# Altium PCB ESP32_SERVO.PcbDoc
Units mil, origin at the board's own origin, x right, y up, seen from the top; angles counter-clockwise.
Board outline 3360 x 3025 mil, 2 copper layers (Top Layer, Bottom Layer); 20 components, 26 nets, 93 pads, 8 vias.
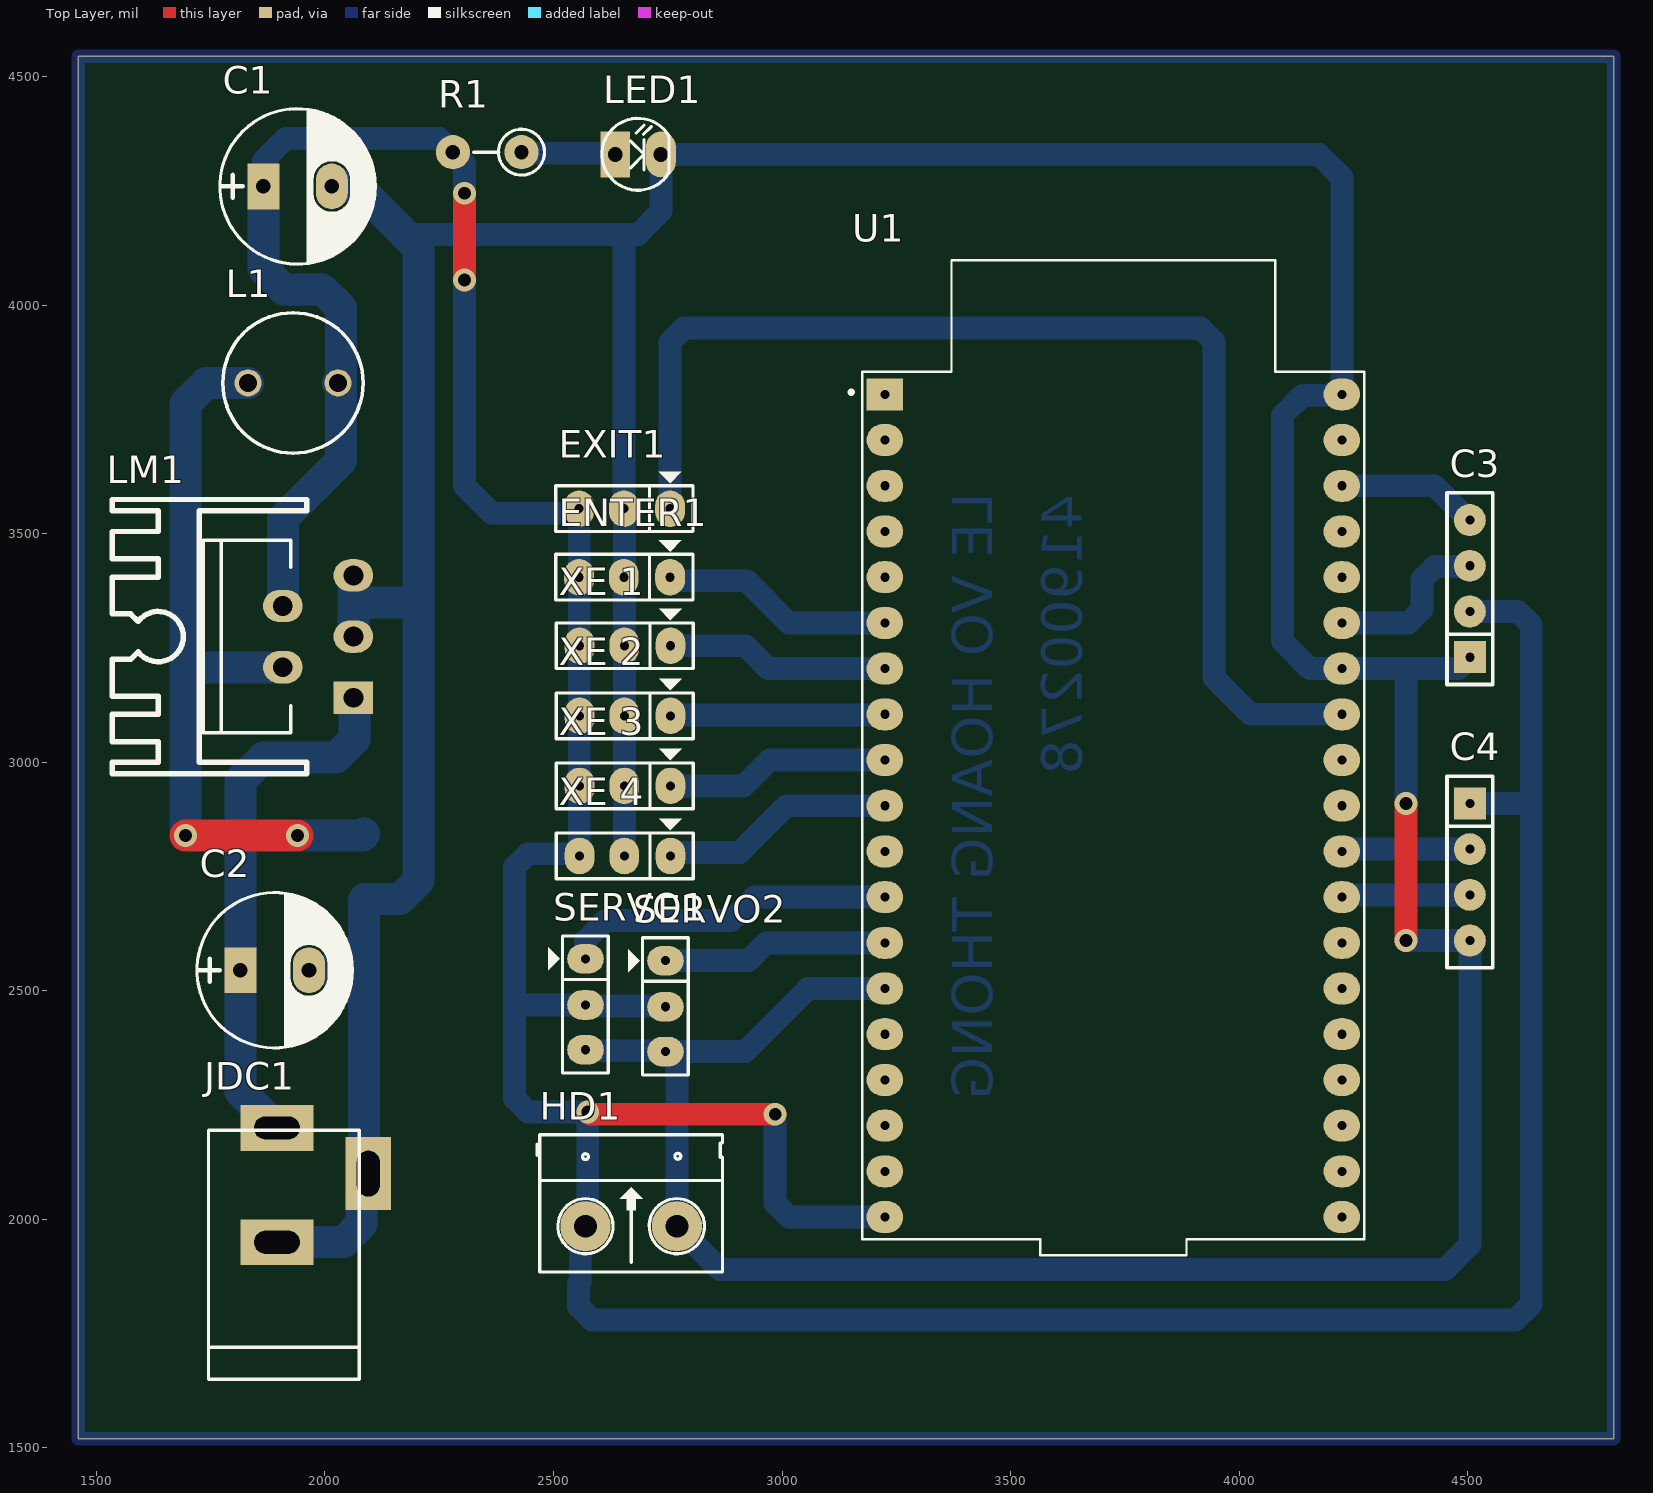
[diagram p0: Top Layer view]
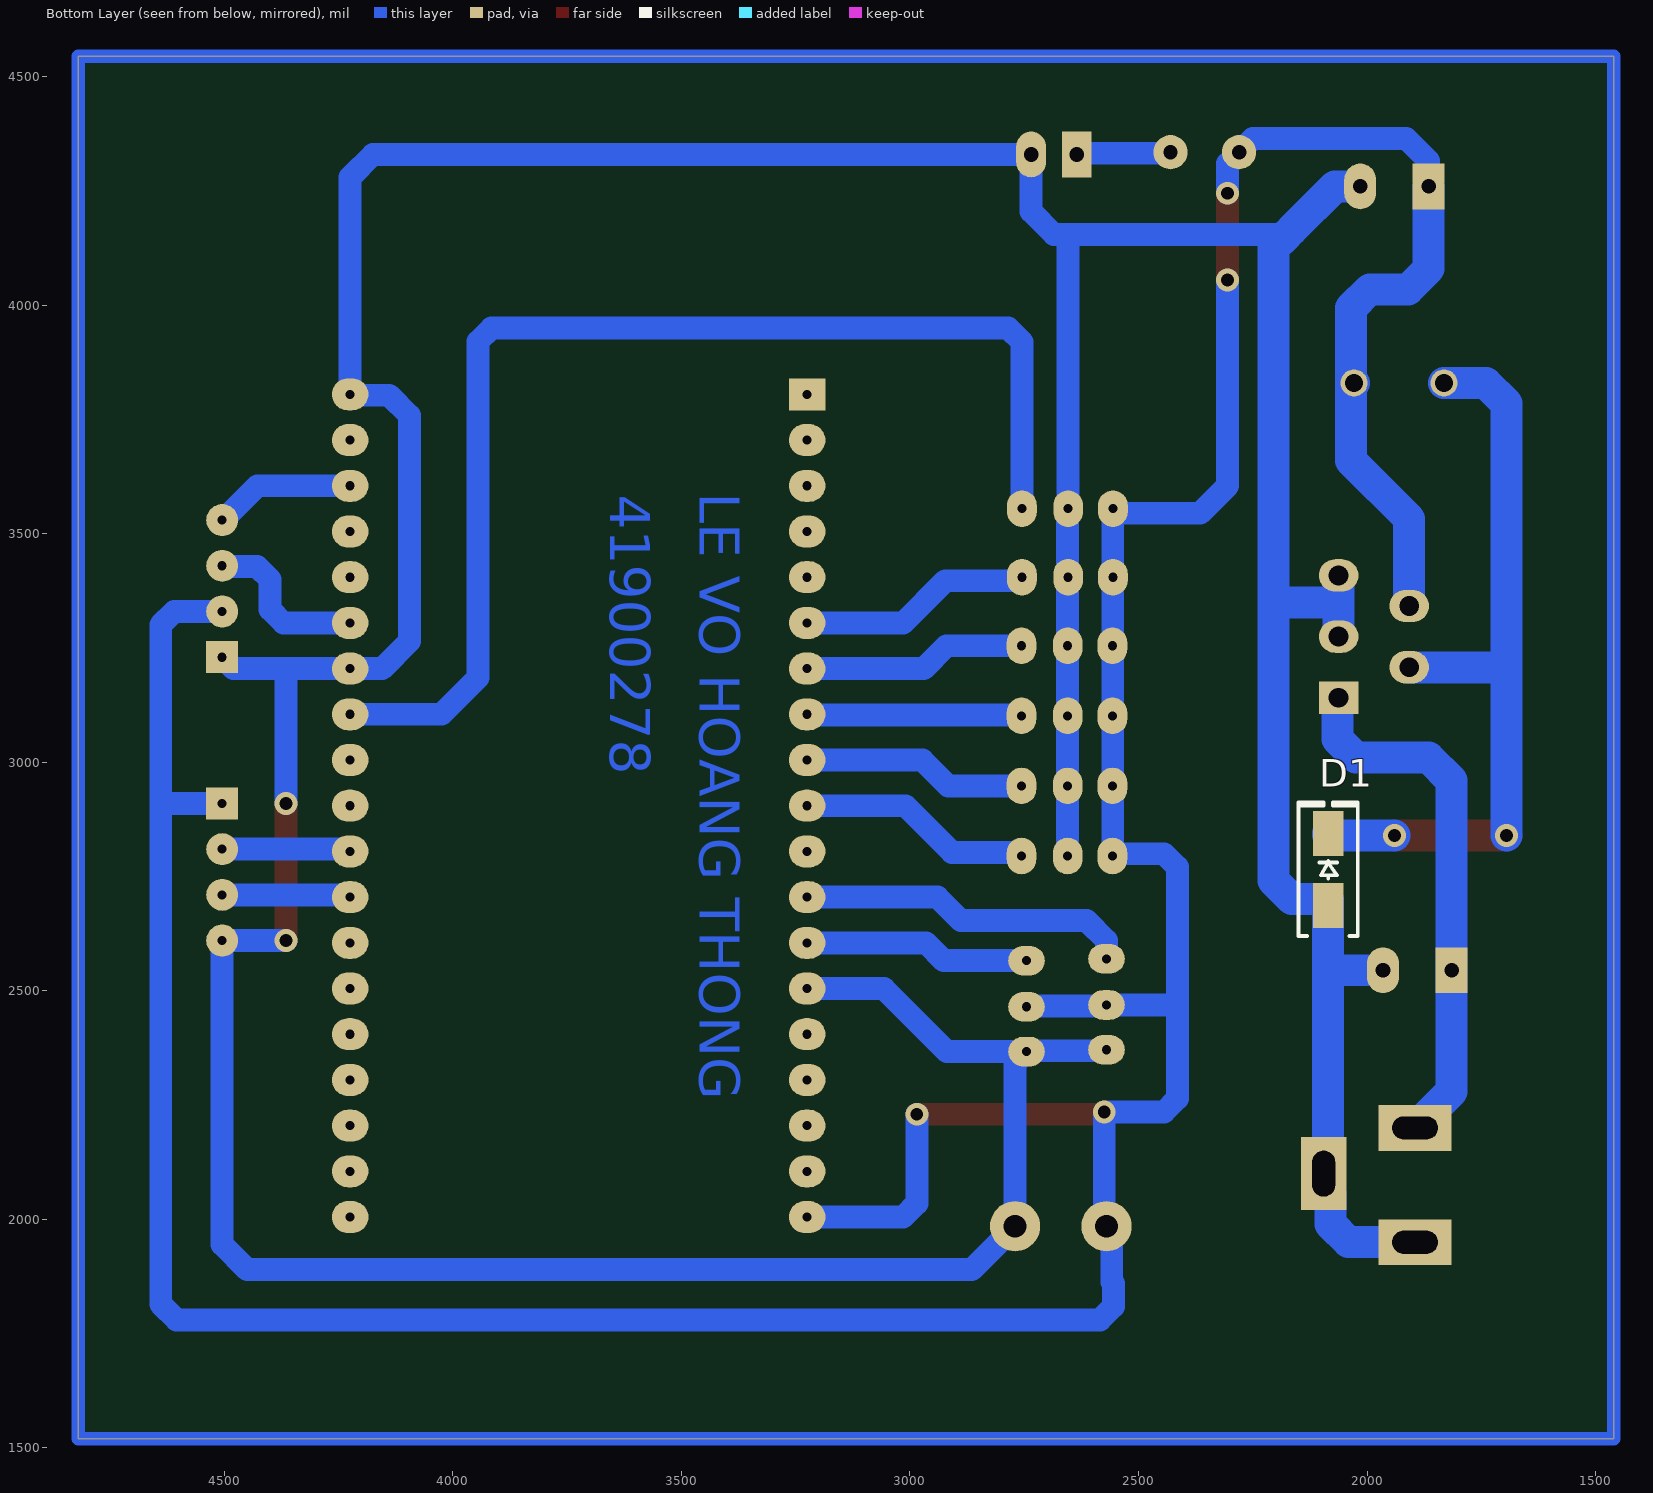
[diagram p1: Bottom Layer view, seen from below]
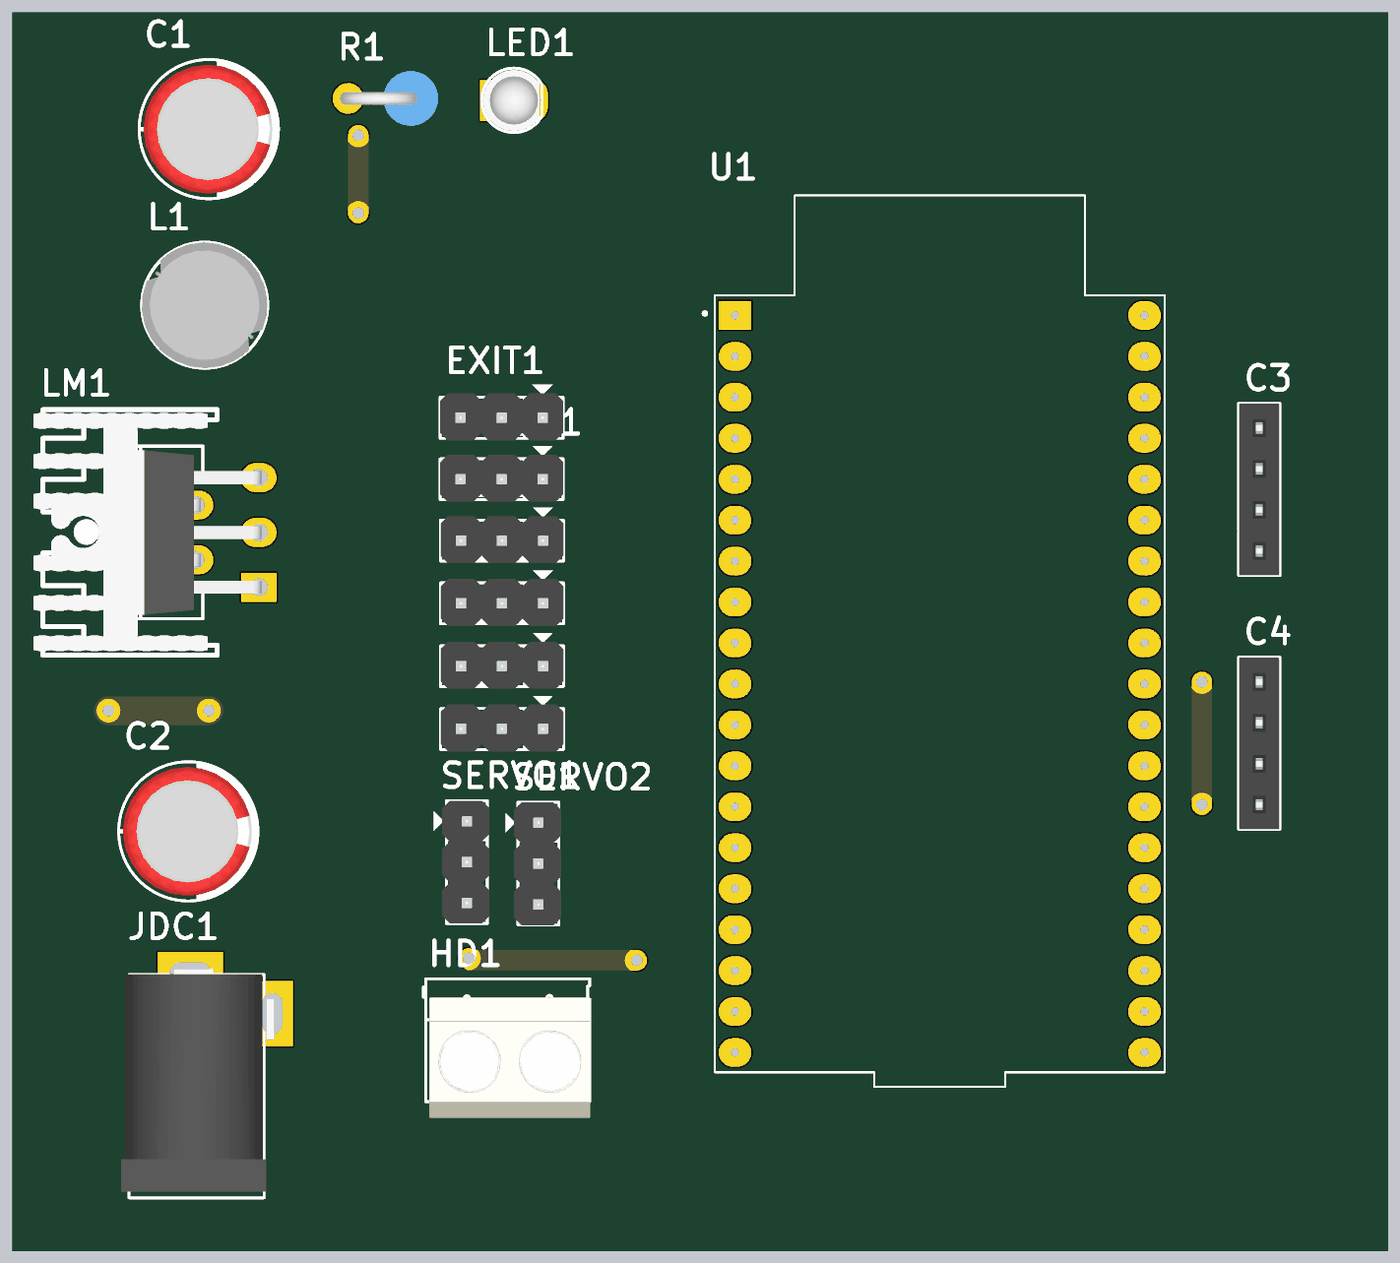
[diagram p2: 3D render of the assembled board from above, using the file's embedded part models]

## Layer stack, top to bottom
Top Solder: solder mask 0.4, Solder Resist, Dk 3.5
Top Layer: signal copper 1.4
Dielectric 1: dielectric 12.6, FR-4, Dk 4.8
Bottom Layer: signal copper 1.4
Bottom Solder: solder mask 0.4, Solder Resist, Dk 3.5

## Board outline
1460,1520 1460,4545 4820,4545 4820,1520

## Design rules (kind name [scope] priority, off if disabled: settings)
Clearance [All] p1: gap=30 ignorepadtopadclearanceinfootprint=FALSE
PolygonConnect [All] p1: connectstyle=Relief reliefconductorwidth=10 reliefentries=4 polygonreliefangle="90 Angle" airgapwidth=10
RoutingVias [All] p1: holewidth=28 width=50 viastyle="Through Hole" minholewidth=28 minwidth=50 maxholewidth=28 maxwidth=50
SolderMaskExpansion [All] p1: expansion=4
Width [All] p1: maxlimit=70 minlimit=35 preferedwidth=50
30 further rules are at their usual default settings.

## Components (designator, comment, footprint, x,y, rotation, side; value= is the part's Value field where it differs from the comment)
C1 "100uF/16V" CP1.5/3.4 1865,4260 r0 top value=1000uF/16V
C2 "100uF/16V" CP1.5/3.4 1815,2545 r0 top value=1000uF/16V
C3 "JP4" JP4-C1T 4505,3230 r90 top
C4 "JP4" JP4-C1T 4505,2910 r270 top
D1 "SS34" "DIODE SMA" 2085,2765 r90 bottom
ENTER1 "" JP3 2655,3405 r180 top value=J3
EXIT1 "" JP3 2655,3555 r180 top value=J3
HD1 "Header 2" HED2 2570,1985 r0 top
JDC1 "Jac DC" DC-IN 1995,2075 r90 top
L1 "3.3 UH" L-DIP-M-7.8 1930,3830 r0 top value="150 mH"
LED1 "LED" LED-3 2635,4330 r0 top value="LED 3 ly Single Colour"
LM1 "LM2576" QTO-220-5-1H1 1985,3275 r90 top
R1 "330" R1/4WD 2430,4335 r180 top value="R1/4W - 1K"
SERVO1 "" JP3 2570,2470 r270 top value=J3
SERVO2 "" JP3 2745,2466 r270 top value=J3
U1 "ESP32-DEVKITC-32U" MODULE_ESP32-DEVKITC-32U 3725,2905.39 r0 top
"XE 1" "" JP3 2656,3255 r180 top value=J3
"XE 2" "" JP3 2656,3101.67 r180 top value=J3
"XE 3" "" JP3 2656,2948.33 r180 top value=J3
"XE 4" "" JP3 2656,2795 r180 top value=J3

## Footprints (in the part's own frame and the unit in brackets; to place one, negate y for a bottom-side part, rotate by r counter-clockwise, add the part's x,y. Pads: shape width x height; smd on the part's side, far side on the other; paste and mask are expansions set on the pad)
CP1.5/3.4 [mil] "Tu hoa 220->470uF,16V, 470uF/16V,25V"
  rect 70x100 hole 32: 1(0,0)
  oval 70x100 hole 32: 2(150,0)
  silkscreen extent -95,-170 245,170, body extent -85,-157 230,157, height 446
DC-IN [mil] "Jac DC input"
  rect 100x160 hole 50 slot 100 at 90 deg: 1(125,100) 2(-125,100)
  rect 160x100 hole 50 slot 100 at 0 deg: 3(25,-100)
  silkscreen extent -425,-80 120,250, body extent -410,-105 134,269, height 434
"DIODE SMA" [mm] "SMA"
  rect 2.5x1.7 smd: 1(-2,0) 2(2,0)
  silkscreen extent -3.68,-1.65 3.75,1.65, body extent -2.6,-1.37 2.6,1.37, height 2.4
HED2 [mil] "Header 2, 2 pin, hight 300mil, Pin to Pin 200, Colour Green"
  round 110 hole 50: 1(0,0) 2(200,0)
  silkscreen extent -106,-100 300,200, body extent -92,-140 302,155, height 394
JP3 [mil] "Jumper 3"
  oval 65x80 hole 20: 1(-100,0) 2(1,0) 3(99,0)
  silkscreen extent -150,-81 150,50, body extent -150,-60 150,55, height 355
JP4-C1T [mil] "4 row, straight, gold plating"
  rect 70x70 hole 20: 1(0,0)
  round 70 hole 20: 2(100,0) 3(200,0) 4(300,0)
  silkscreen extent -60,-50 360,50, body extent -60,-49 360,49, height 335
L-DIP-M-7.8 [mm] "THT Inductor, 2-Leads, Body 7,8  mm"
  round 1.5 hole 1: 1(-2.5,0) 2(2.5,0)
  silkscreen extent -3.9,-3.9 3.9,3.9, body extent -3.9,-3.9 3.89,3.9, height 9.5
LED-3 [mil] "LED 2 PIN, 3ly Only colour"
  rect 65x100 hole 32: 1(0,0)
  oval 65x100 hole 32: 2(100,0)
  silkscreen extent -29,-78 118,79, body extent -25,-75 113,75, height 217
MODULE_ESP32-DEVKITC-32U [mil]
  rect 80x70 hole 20: 1(-500,899.61)
  oval 80x70 hole 20: 2(-500,799.61) 3(-500,699.61) 4(-500,599.61) 5(-500,499.61) 6(-500,399.61) 7(-500,299.61) 8(-500,199.61) 9(-500,99.61) 10(-500,-0.39) 11(-500,-100.39) 12(-500,-200.39) 13(-500,-300.39) 14(-500,-400.39) 15(-500,-500.39) 16(-500,-600.39) 17(-500,-700.39) 18(-500,-800.39) 19(-500,-900.39) 20(500,-900.39) 21(500,-800.39) 22(500,-700.39) 23(500,-600.39) 24(500,-500.39) 25(500,-400.39) 26(500,-300.39) 27(500,-200.39) 28(500,-100.39) 29(500,-0.39) 30(500,99.61) 31(500,199.61) 32(500,299.61) 33(500,399.61) 34(500,499.61) 35(500,599.61) 36(500,699.61) 37(500,799.61) 38(500,899.61)
  silkscreen extent -578,-984 549,1193
QTO-220-5-1H1 [mm] "TO, Thru-Hole, Vertical, Heatsink Mounted; 5 Bent Staggered Leads; Pitch 1.7mm"
  rect 1.8x2.2 hole 1.1: 1(-3.4,-1.96)
  oval 1.8x2.2 hole 1.1: 2(-1.7,1.96) 3(0,-1.96) 4(1.7,1.96) 5(3.4,-1.96)
  round 0 all layers, no hole: 6(0,8.89)
  silkscreen extent -7.62,0.63 7.62,11.43, body extent -7.37,-2.1 7.42,12.01, height 25
R1/4WD [mm] "R 1/4W, 2 Pin, 150mil"
  round 1.905 hole 0.8: 1(0,0) 2(3.81,0)
  silkscreen extent -1.28,-1.28 2.67,1.28, body extent -1.78,-1.7 4.32,1.7, height 13.42

## Part data
C1 C2: library part CP4, "Cap 1000uF/16V - 220uF/50V", Description 1="2200uF-3300uF/6,3V - 1000uF-2200uF/10V", Description 2="1000uF/16V - 470uF => 1000uF/25V - 100uF/100V", Description 3=330uF>470uF/35V_220uF>470uF/50V_10uF>22uF/250V, Description 4="220uF => 330uF/63V - 10uF =>33uF/160 - 200V", Description 5="4,7uF>10uF/250V_3,3uF>10uF/400V - 2,2uF>4,7uF/450V"
C3 C4: "WR-PHD 2.54 mm Angled Socket Header", Manufacturer="Würth Elektronik eiSos GmbH", partNo=613004143121, ComponentLink1 Description=Manufacturer, ComponentLink1URL=http://www.we-online.com, ComponentLink2 Description=Datasheet, ComponentLink2URL=http://katalog.we-online.de/em/datasheet/6130xx143121.pdf, Created by="Karrer Zheng", Created Date="29 March 2013", NoPins=04
D1: library part "Diode SS34 ( 1N5822 )", "D醤", Chung_Loai=D醤, Don_Vi=Con, Ma_Hang=MH002104, Ten_Linh_Kien="Diode SS34 3A 40V SMA ( 1N5822 SS34A)"
ENTER1 EXIT1 SERVO1 SERVO2 "XE 1" "XE 2" "XE 3" "XE 4": library part JP3, "Jumper 3"
HD1: library part Hed2, "Header 2 (Green)"
JDC1: library part DCIN, "Jac DC input"
L1: library part L-DIP-1, "Inductor"
LED1: "LED Single colour Green and Red"
R1: library part R1/4W, "Resistor 1/4W"
U1: "ESP32-DEVKITC", Package=None, Availability=Unavailable, MP=ESP32-DEVKITC-32U, Price=None

## Via types
v1: diameter 50, hole 28, Top Layer to Bottom Layer, 8 vias

## Nets (pads, with @x,y where several pads share a name; then routed paths per layer and width w, separated by ;. In a path a pad name is that pad's centre, name@x,y a point inside that pad or via, vN(x,y) a via of type N, cw(c..) or ccw(c..) an arc to the next point about the centre after c; other vN are vias at no path point)
3V3: U1.1
+5: "XE 1.3" "XE 2.3" "XE 3.3" "XE 4.3" C1.1 C3.2 C4.1 ENTER1.3 EXIT1.3 HD1.1 L1.2 LM1.4 R1.2 SERVO1.2 SERVO2.2 U1.19 | length 9710.4
  Top Layer w50: v1(2305,4055) v1(2305,4245) ; v1(2575,2235) 2580,2230 v1(2985,2230)
  Bottom Layer w50: C1.1 1865,4315.71 1914.29,4365 2250,4365 R1.2 2305,4310 v1(2305,4245) ; v1(2305,4055) 2305,3605 2365,3545 2546,3545 2548.13,3547.13 2549.07,3547.13 2556,3554.06 EXIT1.3 2556.5,3554.5 2556.5,3405 2556.5,3255 2556.5,3101.67 2556.5,2948.33 2556.5,2800 2444.29,2800 2415,2770.71 2415,2469 ; SERVO2.2 2743,2467 2572,2467 SERVO1.2 2415,2469 ; v1(2985,2230) 2985,2035 3015,2005 U1.19 ; C4.1 4639.21,2910 ; C3.2 4609.92,3330 4639.21,3300.71 4639.21,2910 ; 2415,2469 2415,2264.29 2444.29,2235 v1(2575,2235) 2575,1990 HD1.1 2558.52,1973.52 2558.52,1862.81 2555,1859.29 2555,1809.29 2584.29,1780 4605,1780 4639.21,1814.21 4639.21,2910
  Bottom Layer w70: C1.1 1865,4080 1910,4035 1993.99,4035 2035,3993.99 2035,3836.57 L1.2 2035,3823.43 2035,3660 1907.83,3532.83 LM1.4
+12: C2.1 JDC1.1 LM1.1 | length 1181.4
  Bottom Layer w70: JDC1.1 1815,2280 C2.1 1815,2960 1865,3010 2023.99,3010 2065,3051.01 2065,3140.71 2064.57,3141.14 LM1.1 LM1.1@2054.29,3141.14
BUZ: U1.26
GND: "XE 1.2" "XE 2.2" "XE 3.2" "XE 4.2" C1.2 C2.2 C3.1 C4.4 D1.1 ENTER1.2 EXIT1.2 HD1.2 JDC1.2 JDC1.3 LED1.2 LM1.3 LM1.5 SERVO1.3 SERVO2.3 U1.14 U1.32 U1.38 | length 12525.8
  Top Layer w50: v1(4365,2610) v1(4365,2910)
  Bottom Layer w50: 2175,4155 2654,4155 ; SERVO1.3 2572,2369 2743,2369 SERVO2.3 SERVO2.3@2745.94,2367 ; 2655,2795 2655,2948.33 2655,3101.67 2655,3255 2655,3554 EXIT1.2 2654,4155 ; U1.14 3057.14,2505 2919.14,2367 SERVO2.3@2745.94,2367 ; v1(4365,2610) C4.4 4505,1945 4450,1890 2865,1890 HD1.2 2770,2342.94 SERVO2.3@2745.94,2367 ; v1(4365,2910) 4365,3200 4370,3205 ; C3.1 4480,3205 4370,3205 ; 2654,4155 2685,4155 2735,4205 LED1.2 4175,4330 4225,4280 U1.38 4223.04,3803.04 4139.29,3803.04 4095,3758.75 4095,3265 4155,3205 U1.32 4370,3205
  Bottom Layer w70: JDC1.2 2040,1950 2080,1990 2080,2055 2095,2070 JDC1.3 2085,2110 2085,2530 ; C2.2 2070,2545 2085,2530 ; C1.2 2070,4260 2165,4165 ; LM1.3 2062.17,3350 ; LM1.5 2062.17,3350 ; 2175,4155 2205,4125 2205,3340 ; 2062.17,3350 2195,3350 2205,3340 ; 2085,2530 D1.1 2085,2698.94 2086.54,2700.47 2163.99,2700.47 2205,2741.48 2205,3340
IO0: U1.25
IO5: U1.29
IO12: SERVO2.1 U1.13 | length 496.2
  Bottom Layer w50: SERVO2.1 2926,2566 2965,2605 U1.13
IO13: U1.15
IO14: SERVO1.1 U1.12 | length 734.4
  Bottom Layer w50: SERVO1.1 2570,2610 2613.5,2653.5 2888.5,2653.5 2940,2705 U1.12
IO16: C4.3 U1.27 | length 282.1
  Bottom Layer w50: U1.27 4227.77,2705 4232.77,2710 C4.3
IO17: C4.2 U1.28 | length 282.1
  Bottom Layer w50: U1.28 4227.77,2805 4232.77,2810 C4.2
IO18: U1.30
IO19: EXIT1.1 U1.31 | length 2628.4
  Bottom Layer w50: EXIT1.1 2755,3920 2785,3950 3915.71,3950 3945,3920.71 3945,3185 4025,3105 U1.31
IO23: U1.37
IO25: "XE 3.1" U1.9 | length 492.5
  Bottom Layer w50: 2756,2948.33 2916.2,2948.33 2972.87,3005 U1.9
IO26: "XE 4.1" U1.10 | length 515.1
  Bottom Layer w50: 2756,2795 2756,2795.94 2762.93,2802.87 2907.87,2802.87 3010,2905 U1.10
IO27: U1.11
IO32: "XE 1.1" U1.7 | length 489.7
  Bottom Layer w50: 2756,3255 2920,3255 2970,3205 U1.7
IO33: "XE 2.1" U1.8 | length 470.4
  Bottom Layer w50: 2756,3101.67 2757.67,3103.33 3223.33,3103.33 U1.8
IO34: U1.5
IO35: ENTER1.1 U1.6 | length 512
  Bottom Layer w50: ENTER1.1 2755,3404.06 2761.93,3397.13 2922.87,3397.13 3015,3305 U1.6
NetD1_2: D1.2 L1.1 LM1.2 | length 1706
  Top Layer w70: v1(1695,2840) v1(1940,2840)
  Bottom Layer w70: v1(1695,2840) 1695,3207.91 ; L1.1 1740,3830 1695,3785 1695,3207.91 ; LM1.2 1907.67,3207.91 1695,3207.91 ; v1(1940,2840) 2083.46,2840 2085,2841.54 D1.2
NetLED1_1: LED1.1 R1.1 | length 207.1
  Bottom Layer w50: R1.1 2432.5,4332.5 2632.5,4332.5 LED1.1
SCL: C3.4 U1.36 | length 311.1
  Bottom Layer w50: U1.36 4427.7,3605 4502.7,3530 C3.4
SDA: C3.3 U1.33 | length 370.3
  Bottom Layer w50: U1.33 4370.71,3305 4400,3334.29 4400,3400 4428.12,3428.12 4503.12,3428.12 C3.3
pads on no net: LM1.6 U1.2 U1.3 U1.4 U1.16 U1.17 U1.18 U1.20 U1.21 U1.22 U1.23 U1.24 U1.34 U1.35
copper on no net: | length 12770
  Bottom Layer w30: 1460,1520 4820,1520 4820,4545 1460,4545 1460,1520

## Other copper
Bottom Layer:
  text "LE VO HOANG THONG" at 3490,3590 h150 r90
  text "41900278" at 3685,3585 h150 r90